# EAGLE board brushbot2.0 (EAGLE 9.4.2)
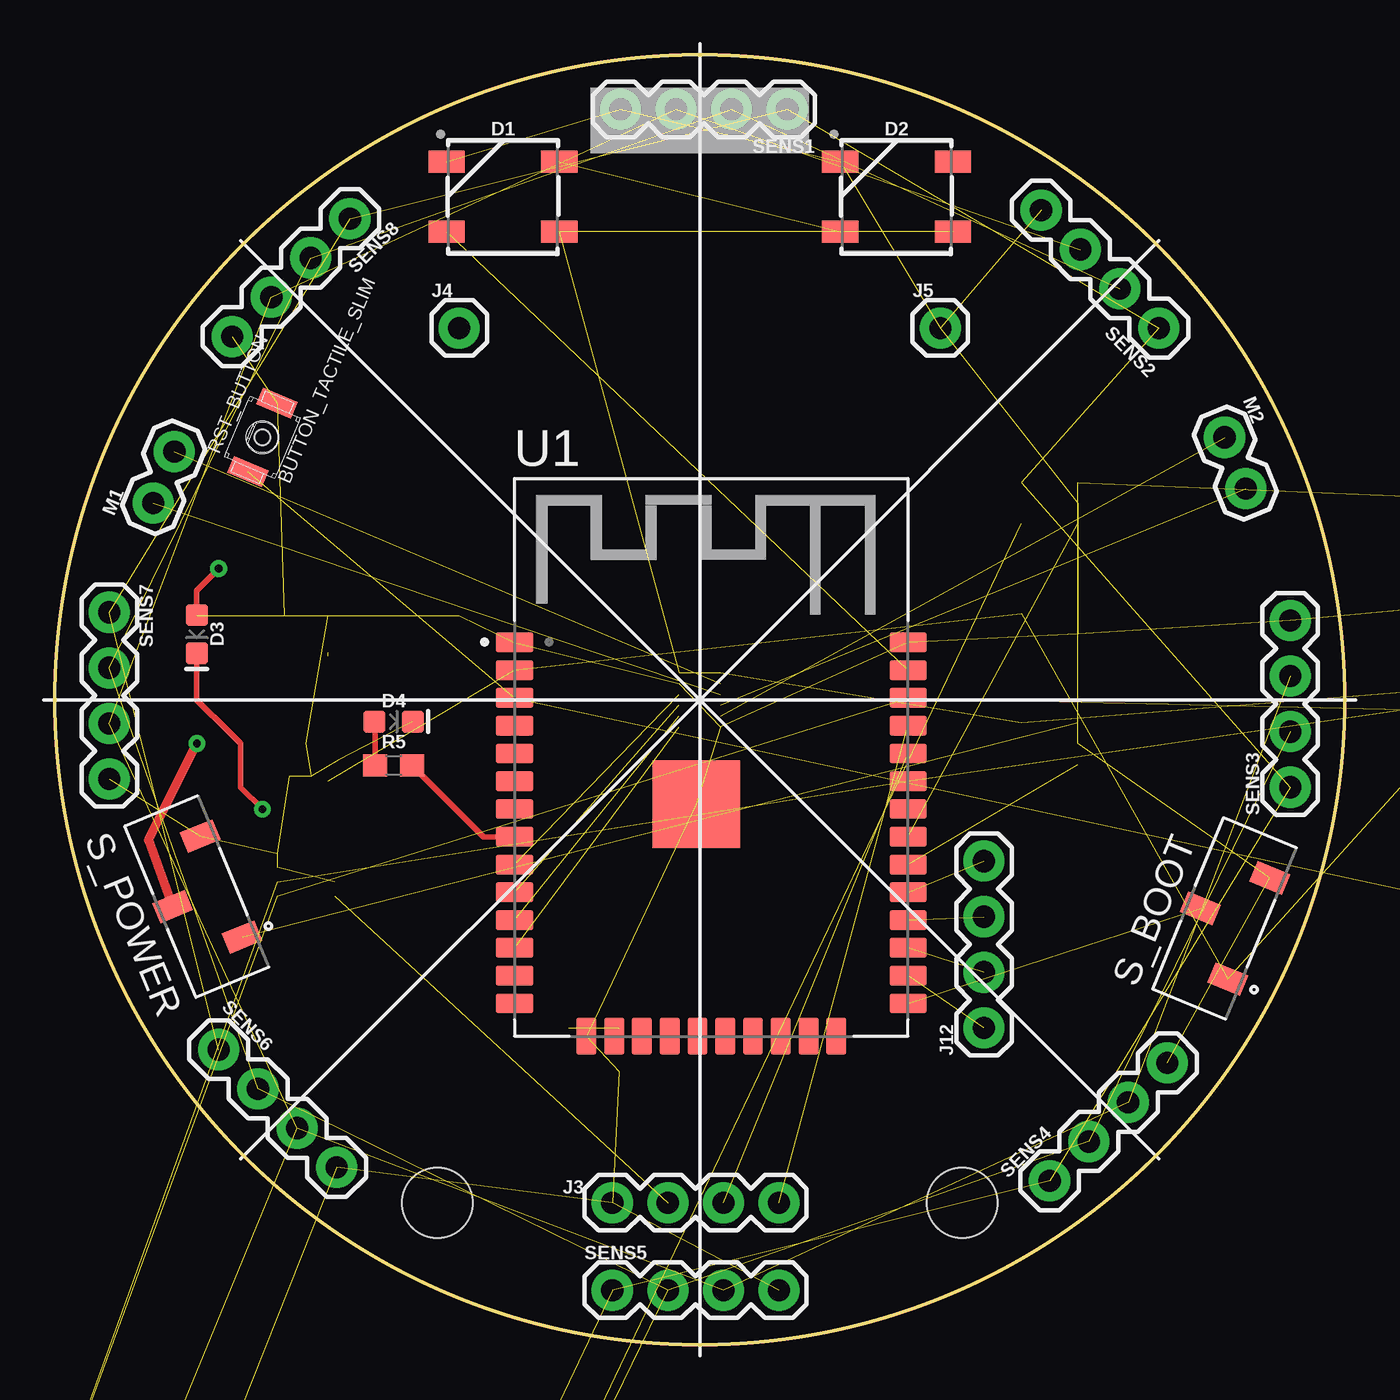
[diagram p0: board, top side]
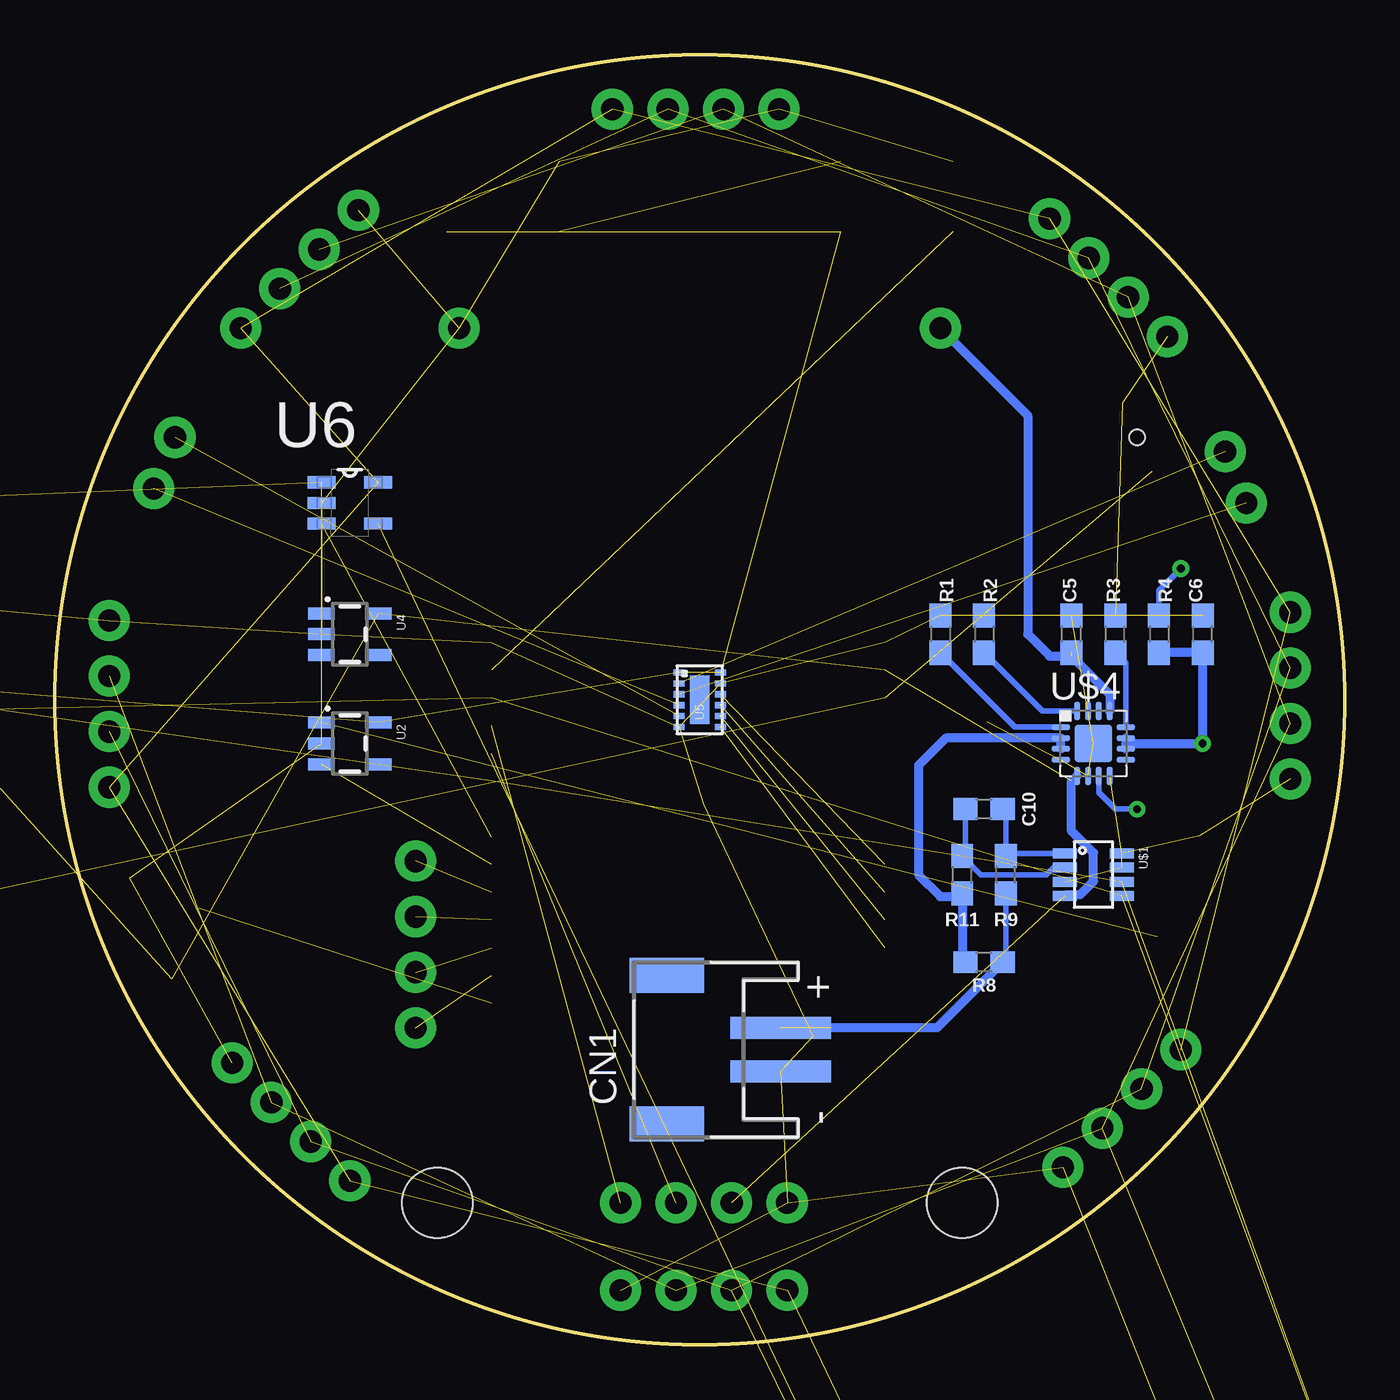
[diagram p1: board, bottom side, seen from below]

Size 59 x 59 mm. Coordinates in mm from the lower left corner, seen from the top.
Outline: circle at 29.5,29.5 radius 29.5
Copper layers (1*16): Top 0.035mm / dielectric 1.5mm / Bottom 0.035mm
Design rules "default": minimum track width 6mil, minimum drill 0.35mm, track to track 6mil, track to pad 6mil, pad to pad 6mil, via to via 6mil, smd to smd 6mil, copper to edge 40mil, drill to drill 6mil, minimum pad ring 10mil, minimum via ring 8mil, stop-mask expansion 4mil, vias tented up to drill 0mil, thermal gap 10mil
Holes 3.2 mm at 41.5,6.5 17.5,6.5

## Footprints (pad centres in the part's own frame; a part is rotated, then mirrored left to right if it is on the bottom)
0603 = smd 1.1 x 1: 1 -0.85,0; 2 0.85,0
JST-PH-2-SMT-RA = smd 1 x 4.6: 1 1,-3.7; 2 -1,-3.7 | smd 1.6 x 3.4: NC1 -3.4,1.5; NC2 3.4,1.5
WS2812B = smd 1.651 x 1: 1 2.577,-1.6; 2 2.577,1.6; 3 -2.577,1.6; 4 -2.577,-1.6
LED-0603 = smd 1 x 1: A -0.877,0; C 0.877,0
1X04 = drill 1.016 pad 1.88: 1 0,0; 2 2.54,0; 3 5.08,0; 4 7.62,0
1X01 = drill 1.016 pad 1.88: 1 0,0
1X02 = drill 1.016 pad 1.88: 1 0,0; 2 2.54,0
BUTTON_TACTILE_SLIM = smd 0.8 x 1.7: 1 -1.7,0; 2 1.7,0 | hole 0.7: 0,0
SW_JS102011JCQN = smd 1 x 1.6: 1 -2.5,-1.2; 2 0,1.2; 3 2.5,-1.2
MODULE_ESP-WROOM-32 = smd 1.7 x 0.9: 1 -9,8.255; 2 -9,6.985; 3 -9,5.715; 4 -9,4.445; 5 -9,3.175; 6 -9,1.905; 7 -9,0.635; 8 -9,-0.635; 9 -9,-1.905; 10 -9,-3.175; 11 -9,-4.445; 12 -9,-5.715; 13 -9,-6.985; 14 -9,-8.255; 25 9,-8.255; 26 9,-6.985; 27 9,-5.715; 28 9,-4.445; 29 9,-3.175; 30 9,-1.905; 31 9,-0.635; 32 9,0.635; 33 9,1.905; 34 9,3.175; 35 9,4.445; 36 9,5.715; 37 9,6.985; 38 9,8.255 | smd 4 x 4: 1.1 -0.7,0.845 | smd 0.9 x 1.7: 15 -5.715,-9.755; 16 -4.445,-9.755; 17 -3.175,-9.755; 18 -1.905,-9.755; 19 -0.635,-9.755; 20 0.635,-9.755; 21 1.905,-9.755; 22 3.175,-9.755; 23 4.445,-9.755; 24 5.715,-9.755
SOT23-5 = smd 0.55 x 1.2: 1 -0.95,-1.3; 2 0,-1.3; 3 0.95,-1.3; 4 0.95,1.3; 5 -0.95,1.3
12WSON = smd 0.28 x 0.5: 1 -1.25,-0.95; 2 -0.75,-0.95; 3 -0.25,-0.95; 4 0.25,-0.95; 5 0.75,-0.95; 6 1.25,-0.95; 7 1.25,0.95; 8 0.75,0.95; 9 0.25,0.95; 10 -0.25,0.95; 11 -0.75,0.95; 12 -1.25,0.95 | smd 2.2 x 0.9: TH 0,0
SOT95P280X145-5N = smd 1.27 x 0.559: 1 -1.295,0.94; 2 -1.295,0; 3 -1.295,-0.94; 4 1.295,-0.94; 5 1.295,0.94
SOT-23-8 = smd 0.45 x 1.1: 1 -0.975,-1.3; 2 -0.325,-1.3; 3 0.325,-1.3; 4 0.975,-1.3; 5 0.975,1.3; 6 0.325,1.3; 7 -0.325,1.3; 8 -0.975,1.3
SOT23-3 = smd 0.8 x 0.9: 1 -0.95,-1; 2 0.95,-1; 3 0,1.1
QFN16 = smd 0.85 x 0.28: 1 -1.475,0.75; 2 -1.475,0.25; 3 -1.475,-0.25; 4 -1.475,-0.75; 9 1.475,-0.75; 10 1.475,-0.25; 11 1.475,0.25; 12 1.475,0.75 | smd 0.28 x 0.85: 5 -0.75,-1.475; 6 -0.25,-1.475; 7 0.25,-1.475; 8 0.75,-1.475; 13 0.75,1.475; 14 0.25,1.475; 15 -0.25,1.475; 16 -0.75,1.475 | smd 1.7 x 1.7: TH 0,0

## Placement (x,y rotation side)
C1  1.0uF  [0603]  70.5,38.5 0 top  (outside the outline)
C2  1.0uF  [0603]  70.5,34.5 0 top  (outside the outline)
C3  1.0uF  [0603]  70.5,30.5 0 top  (outside the outline)
C4  10uF  [0603]  -73.5,-207.5 0 top  (outside the outline)
C5  1.0uF  [0603]  12.5,32.5 90 bottom
C6  4.7uF  [0603]  6.5,32.5 90 bottom
C7  0.1uF  [0603]  82.5,12.5 0 top  (outside the outline)
C8  0.1uF  [0603]  82.5,8.5 0 top  (outside the outline)
C9  0.1uF  [0603]  82.5,4.5 0 top  (outside the outline)
C10  0.1uF  [0603]  16.5,24.5 180 bottom
C11  10nF  [0603]  -73.5,-211.5 0 top  (outside the outline)
CN1  [JST-PH-2-SMT-RA]  29.5,13.5 90 bottom
D1  WS2812B  [WS2812B]  20.5,52.5 0 top
D2  WS2812B  [WS2812B]  38.5,52.5 0 top
D3  RED  [LED-0603]  6.5,32.5 270 top
D4  RED  [LED-0603]  15.5,28.5 0 top
FRAME2  FRAME-LEDGER  [CREATIVE_COMMONS]  -41.5,-31.5 0 top  (outside the outline)
J3  [1X04]  25.5,6.5 0 top
J4  [1X01]  18.5,46.5 0 top
J5  [1X01]  40.5,46.5 0 top
J12  [1X04]  42.5,14.5 90 top
M1  [1X02]  4.5,38.5 67.5 top
M2  [1X02]  53.5,41.5 292.5 top
R1  10k  [0603]  18.5,32.5 270 bottom
R2  1.8k  [0603]  16.5,32.5 270 bottom
R3  1k  [0603]  10.5,32.5 90 bottom
R4  1k  [0603]  8.5,32.5 270 bottom
R5  47k  [0603]  15.5,26.5 0 top
R6  4.7k  [0603]  86.5,32.5 0 top  (outside the outline)
R7  4.7k  [0603]  86.5,28.5 0 top  (outside the outline)
R8  0.05  [0603]  16.5,17.5 180 bottom
R9  10  [0603]  15.5,21.5 90 bottom
R10  10k  [0603]  82.5,16.5 0 top  (outside the outline)
R11  10  [0603]  17.5,21.5 90 bottom
R12  4.7k  [0603]  -80.5,-215.5 0 top  (outside the outline)
R13  4.7k  [0603]  -80.5,-219.5 0 top  (outside the outline)
R14  4.7k  [0603]  -80.5,-223.5 0 top  (outside the outline)
R15  4.7k  [0603]  -80.5,-227.5 0 top  (outside the outline)
RST_BUTTON  BUTTON_TACTILE_SLIM  [BUTTON_TACTILE_SLIM]  9.5,41.5 67 top
S_BOOT  JS102011JCQN  [SW_JS102011JCQN]  53.5,19.5 67.5 top
S_POWER  JS102011JCQN  [SW_JS102011JCQN]  6.5,20.5 112.5 top
SENS1  [1X04]  33.5,56.5 180 top
SENS2  [1X04]  50.5,46.5 135 top
SENS3  [1X04]  56.5,25.5 90 top
SENS4  [1X04]  45.5,7.5 45 top
SENS5  [1X04]  25.5,2.5 0 top
SENS6  [1X04]  7.5,13.5 315 top
SENS7  [1X04]  2.5,33.5 270 top
SENS8  [1X04]  13.5,51.5 225 top
U1  ESP-WROOM-32  [MODULE_ESP-WROOM-32]  30.03,23.87 0 top
U2  3.3V  [SOT23-5]  45.5,27.5 270 bottom
U4  3.3V  [SOT23-5]  45.5,32.5 270 bottom
U5  DRV8836  [12WSON]  29.5,29.5 270 bottom
U6  TPS79328DBVR  [SOT95P280X145-5N]  45.5,38.5 0 bottom
U$1  INA219  [SOT-23-8]  11.5,21.5 270 bottom
U$2  BSS138  [SOT23-3]  -77.5,-211.5 0 top  (outside the outline)
U$3  BSS138  [SOT23-3]  -81.5,-211.5 0 top  (outside the outline)
U$4  BQ24075  [QFN16]  11.5,27.5 0 bottom

## Library data of the parts
C1-C3 C5 = SparkFun-Capacitors; PROD_ID: CAP-00868
C4 = SparkFun-Capacitors; PROD_ID: CAP-11015
C6 = SparkFun-Capacitors; PROD_ID: CAP-08280
C7-C10 = SparkFun-Capacitors; PROD_ID: CAP-00810
C11 = SparkFun-Capacitors; PROD_ID: CAP-00867
CN1 = adafruit
D1 D2 = SparkFun-LED; PROD_ID: DIO-12503
D3 D4 = SparkFun-LED; PROD_ID: DIO-00819
FRAME2 RST_BUTTON U$1-U$3 = GRITSBot
J3 J12 SENS1-SENS8 = SparkFun-Connectors; PROD_ID: CONN-09696
J4 J5 M1 M2 = SparkFun-Connectors
R1 R10 = SparkFun-Resistors; PROD_ID: RES-00824
R2 = SparkFun-Resistors; PROD_ID: RES-09119
R3 R4 = SparkFun-Resistors; PROD_ID: RES-07856
R5 = SparkFun-Resistors; PROD_ID: RES-07871
R6 R7 R12-R15 = SparkFun-Resistors; PROD_ID: RES-07857
R8 = SparkFun-Resistors; PROD_ID: RES-12535
R9 R11 = SparkFun-Resistors; PROD_ID: RES-12581
S_BOOT S_POWER = JS102011JCQN; AVAILABILITY: Unavailable; DESCRIPTION: Switch Slide Spdt 300ma 6v; MF: C&K; MP: JS102011JCQN; PACKAGE: None; PRICE: None
U1 = ESP-WROOM-32; DESCRIPTION: Module: combo; GPIO, I2C x2, I2S x2, SDIO, SPI x3, UART x3; 19.5dBm; DIGI-KEY_PART_NUMBER: 1188-1178-ND; DIGI-KEY_PURCHASE_URL: https://www.digikey.com/product-detail/en/olimex-ltd/ESP-WROOM-32/1188-1178-ND/6580750?utm_source=snapeda&utm_medium=aggregator&utm_campaign=symbol; MF: Olimex LTD; MP: ESP-WROOM-32; PACKAGE: Module Olimex LTD
U2 U4 = SparkFun-IC-Power; PROD_ID: VREG-12457
U5 = balto
U6 = TPS79328DBVR; AVAILABILITY: Unavailable; DESCRIPTION: Single Output LDO, 200mA, Fixed_2.8V_, High PSRR, Low Noise 5-SOT-23 -40 to 125; MF: Texas Instruments; MP: TPS79328DBVR; PACKAGE: SOT-23-5 Texas Instruments; PRICE: None
U$4 = TI-bq24075

## Nets
26: J12.1 U1.26
27: J12.2 U1.27
28: J12.3 U1.28
29: J12.4 U1.29
AIN1: U1.9 U5.10
AIN2: U1.10 U5.9
BIN1: U1.11 U5.8
BIN2: U1.12 U5.7
GND: C1.2 C2.2 C3.2 C4.2 C5.2 C6.2 C7.1 C8.1 C9.1 C11.2 CN1.2 D1.3 D2.3 D4.C J3.1 J5.1 R1.1 R2.1 R3.2 RST_BUTTON.2 S_BOOT.3 S_POWER.3 SENS1.4 SENS2.4 SENS3.4 SENS4.4 SENS5.4 SENS6.4 SENS7.4 SENS8.4 U1.1 U1.1.1 U1.15 U1.38 U2.2 U4.2 U5.6 U5.11 U6.2 U$1.3 U$1.7 U$1.8 U$4.4 U$4.6 U$4.8 U$4.15 U$4.TH
GPIO0: S_BOOT.2 U1.25
LED1OUT: D1.2 D2.4
LEDS: D1.4 U1.37
M1+: M1.2 U5.2
M1-: M1.1 U5.3
M2+: M2.2 U5.4
M2-: M2.1 U5.5
MOTOR_EN: U1.30 U2.3
N$1: R1.2 U$4.1
N$2: C1.1 S_POWER.1 U2.1 U4.1 U4.3 U6.1
N$3: R2.2 U$4.16
N$4: R3.1 U$4.12
N$5: C10.1 R9.2 U$1.1
N$6: R7.2
N$7: D3.C U$4.7
N$8: D3.A R4.1
N$9: R5.2 U1.8
N$10: D4.A R5.1
N$11: C10.2 R11.2 U$1.2
N$12: CN1.1 R8.1 R9.1
N$14: C11.1 U6.4
N$15: R15.1 U$2.3
N$16: R14.1 U$3.3
RESET: C7.2 R10.1 RST_BUTTON.1 U1.3
SCL1: R7.1 R14.2 U1.36 U$1.5
SCL1_LOW: R13.1 SENS1.3 SENS2.3 SENS3.3 SENS4.3 SENS5.3 SENS6.3 SENS7.3 SENS8.3 U$3.2
SDA1: R6.1 R15.2 U1.33 U$1.6
SDA1_LOW: R12.1 SENS1.2 SENS2.2 SENS3.2 SENS4.2 SENS5.2 SENS6.2 SENS7.2 SENS8.2 U$2.2
SENS_EN: U1.31 U6.3
U0RX: J3.3 U1.34
U0TX: J3.4 U1.35
V_SUP: C6.1 R4.2 S_POWER.2 U$4.10 U$4.11
VBAT: R8.2 R11.1 U$4.2 U$4.3
VCC1: C2.1 C8.2 C9.2 J3.2 R6.2 R10.2 S_BOOT.1 U1.2 U4.5 U$1.4 U$4.5
VCC2: C3.1 D1.1 D2.1 U2.5 U5.1 U5.12
VCC3: C4.1 R12.2 R13.2 SENS1.1 SENS2.1 SENS3.1 SENS4.1 SENS5.1 SENS6.1 SENS7.1 SENS8.1 U6.5 U$2.1 U$3.1
VCHRG: C5.1 J4.1 U$4.13

## Tracks (layer width: path | path; a pad name or v marks a point on that pad's centre or on a via)
26  (1 unrouted)
27  (1 unrouted)
28  (1 unrouted)
29  (1 unrouted)
AIN1  (1 unrouted)
AIN2  (1 unrouted)
BIN1  (1 unrouted)
BIN2  (1 unrouted)
GND  (46 unrouted)
GPIO0  (1 unrouted)
LED1OUT  (1 unrouted)
LEDS  (1 unrouted)
M1+  (1 unrouted)
M1-  (1 unrouted)
M2+  (1 unrouted)
M2-  (1 unrouted)
MOTOR_EN  (1 unrouted)
N$1
  Bottom 0.254: R1.2 15.1,28.25 U$4.1
N$2  (5 unrouted)
N$3
  Bottom 0.254: R2.2 13.82,28.98 U$4.16
N$4
  Bottom 0.254: R3.1 10.02,31.17 U$4.12
N$5
  Bottom 0.254: R9.2 15.65,22.5 | R9.2 15.5,24.35 C10.1 | R9.2 15.38,22.48 U$1.1
N$7  (via drill 0.35)
  Top 0.254: D3.C 6.5,29.5 8,28 8.5,27.5 8.5,25.5 v9.5,24.5
  Bottom 0.254: v9.5,24.5 10.5,24.5 11.25,25.25 U$4.7
N$8  (via drill 0.35)
  Top 0.254: v7.5,35.5 6.5,34.5 D3.A
  Bottom 0.254: R4.1 8.5,34.5 v7.5,35.5
N$9
  Top 0.254: R5.2 19.62,23.23 U1.8
N$10
  Top 0.254: R5.1 14.65,28.47 D4.A
N$11
  Bottom 0.254: C10.2 17.35,22.5 R11.2 16.65,21.5 13.64,21.5 13.32,21.83 U$1.2
N$12  (1 unrouted)
  Bottom 0.254: R8.1 15.5,17.65 R9.1
  Bottom 0.406: 23.5,14.5 20.5,14.5 20.35,14.5 18.65,14.5 R8.1
N$14  (1 unrouted)
N$15  (1 unrouted)
N$16  (1 unrouted)
RESET  (3 unrouted)
SCL1  (3 unrouted)
SCL1_LOW  (9 unrouted)
SDA1  (3 unrouted)
SDA1_LOW  (9 unrouted)
SENS_EN  (1 unrouted)
U0RX  (1 unrouted)
U0TX  (1 unrouted)
V_SUP  (via drill 0.35)
  Top 0.406: 6.61,27.39 v6.5,27.5 4.29,23.08 S_POWER.2
  Bottom 0.406: R4.2 C6.1 v6.5,27.5 10.02,27.5 | U$4.11 10.02,27.5 | 10.02,27.5 U$4.10
VBAT
  Bottom 0.254: R11.1 17.5,20.5 | 17.5,17.65 R8.2
  Bottom 0.406: 17.5,20.5 18.5,20.5 19.5,21.5 19.5,26.5 18.25,27.75 U$4.2 U$4.3 | R11.1 17.5,17.65
VCC1  (9 unrouted)
  Bottom 0.406: U$1.4 12.73,20.59 12.1,20.59 11.5,21.2 11.5,22.5 12.5,23.5 12.5,25.77 U$4.5
VCC2  (5 unrouted)
VCC3  (13 unrouted)
VCHRG  (1 unrouted)
  Bottom 0.406: U$4.13 10.75,29.75 12.5,31.5 13.5,31.5 14.5,32.5 14.5,42.5 J4.1